# Altium PCB Board_PCB.PcbDoc (part 1 of 3)
Units mm, origin at the board's own origin, x right, y up, seen from the top; angles counter-clockwise.
Board outline 122.55 x 106.6 mm, 2 copper layers (Top Layer, Bottom Layer); 120 components, 188 nets, 670 pads, 282 vias.
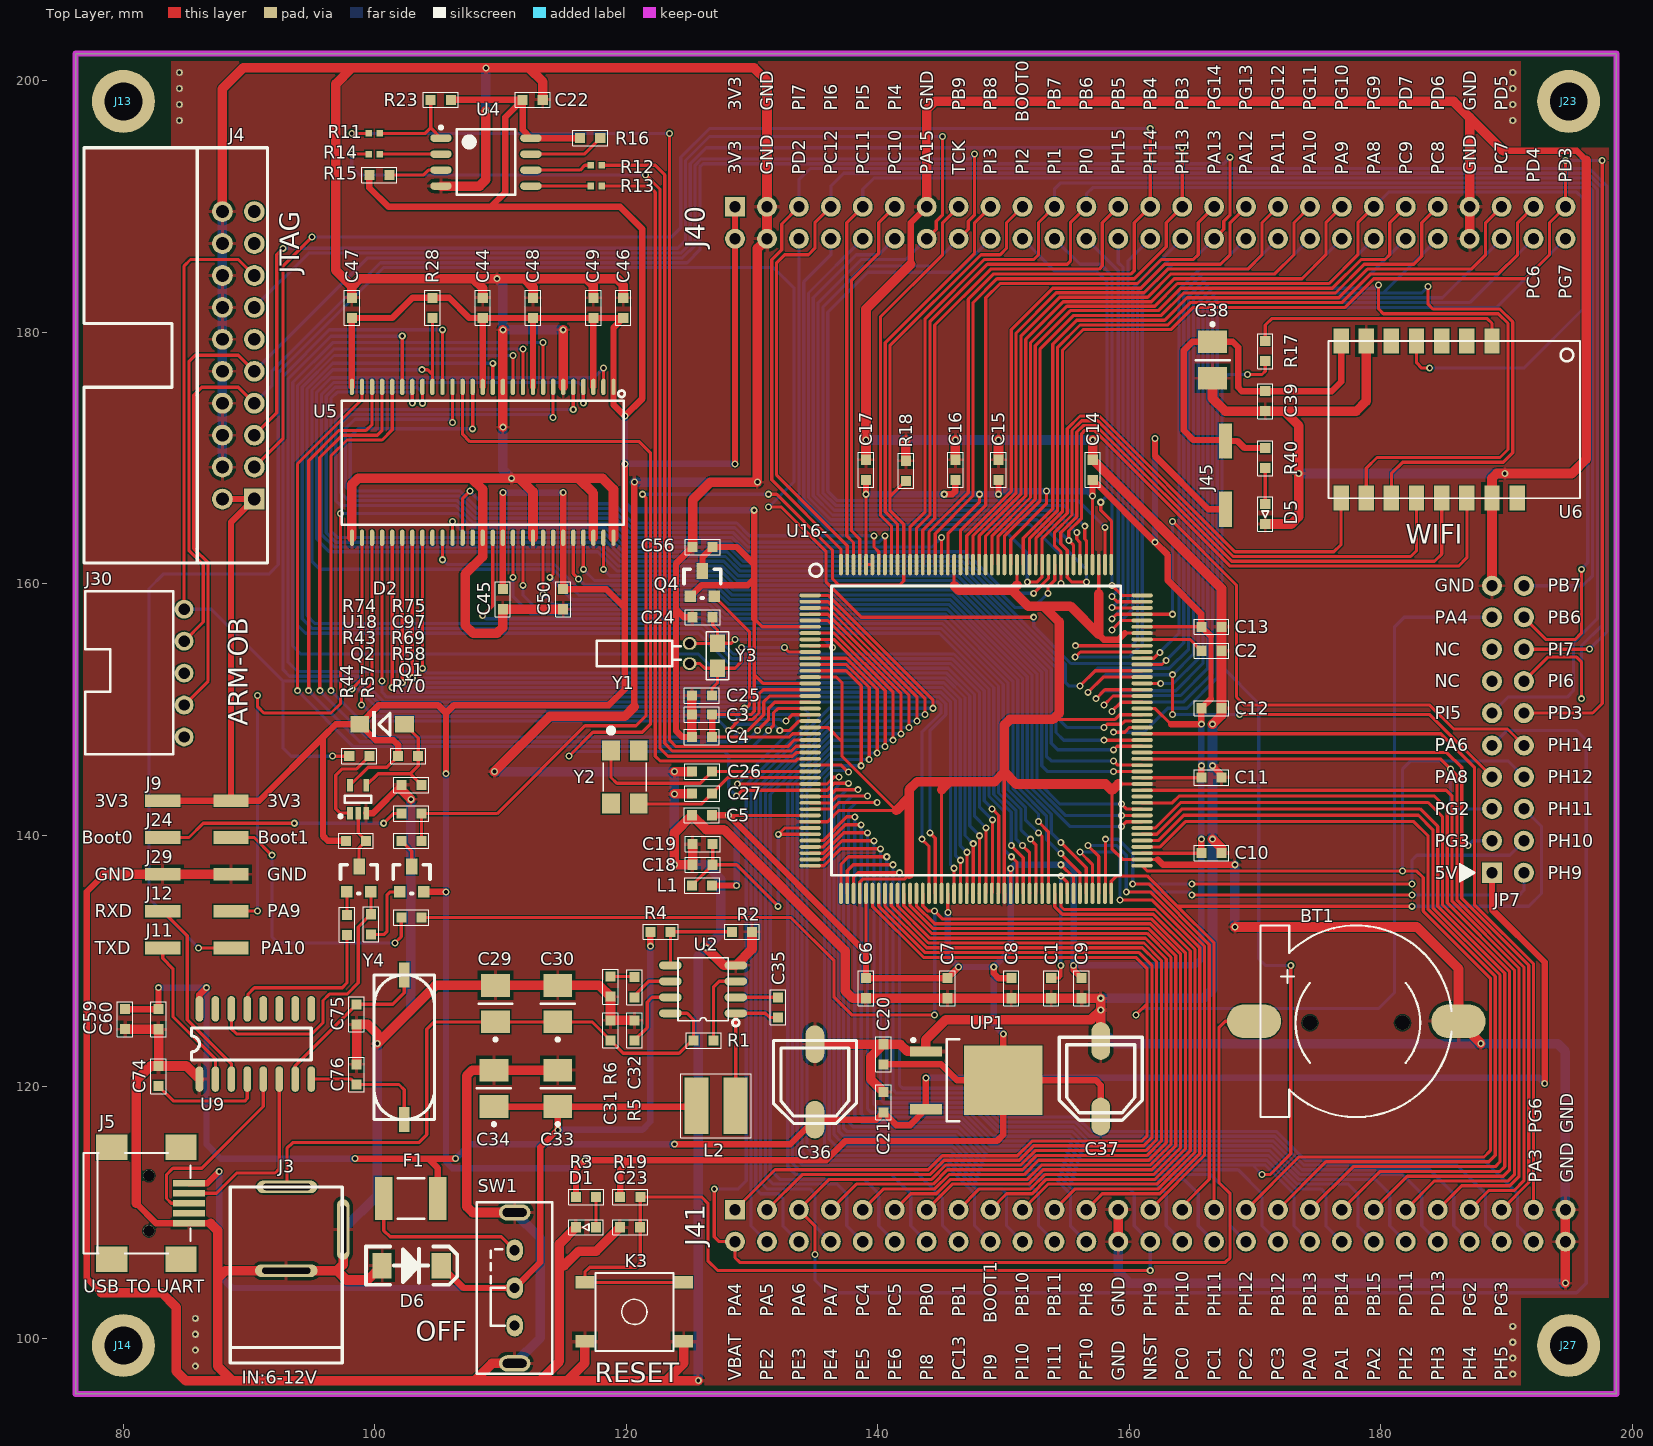
[diagram p0: Top Layer view]
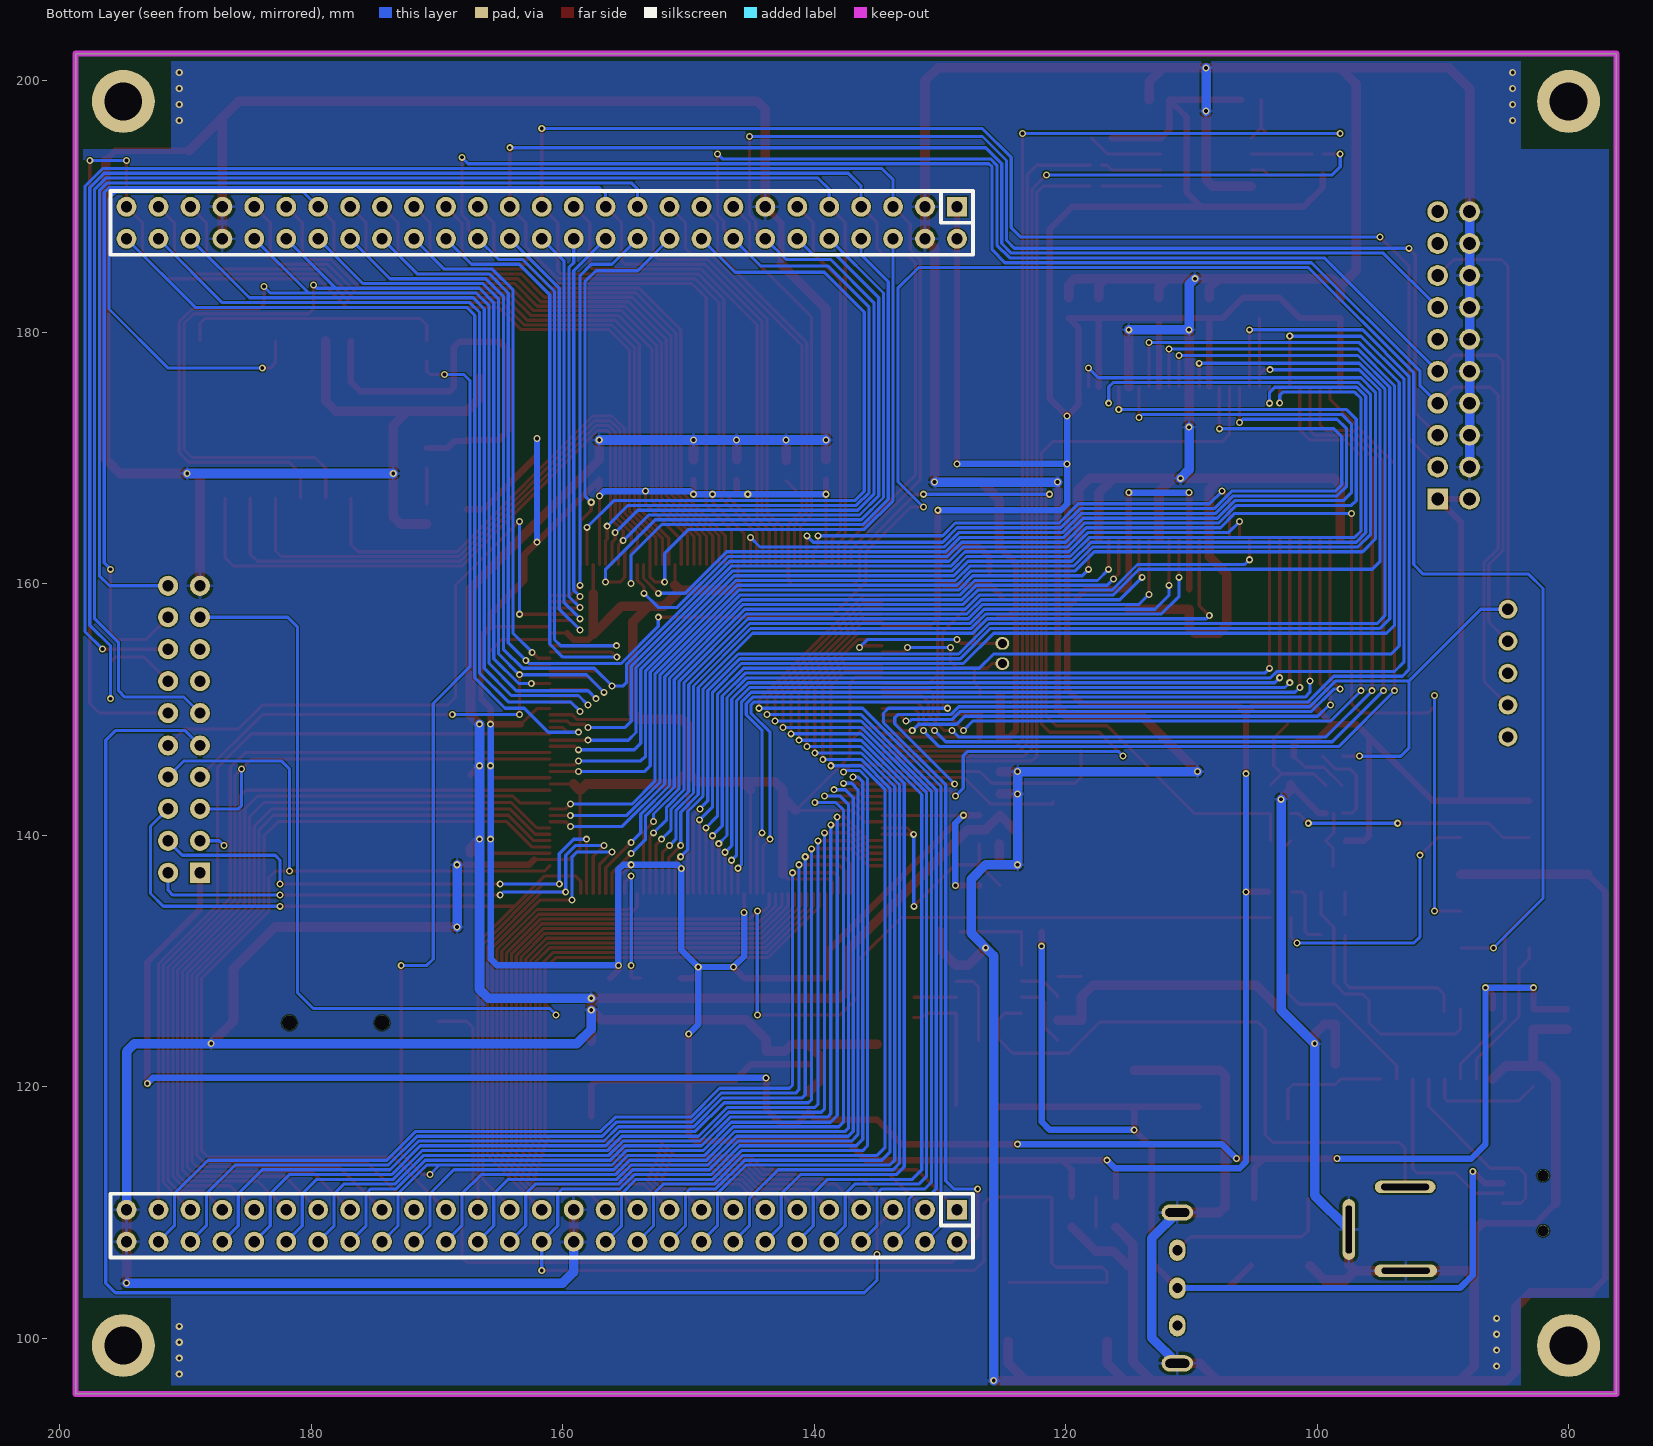
[diagram p1: Bottom Layer view, seen from below]

## Layer stack, top to bottom
Top Solder: solder mask 0.0102, Solder Resist, Dk 3.5
Top Layer: signal copper 0.0356
Dielectric 1: dielectric 0.32, FR-4, Dk 4.8
Bottom Layer: signal copper 0.0356
Bottom Solder: solder mask 0.0102, Solder Resist, Dk 3.5

## Board outline
76.2,95.584 76.2,202.184 198.75,202.184 198.75,95.584

## Design rules (kind name [scope] priority, off if disabled: settings)
Clearance [All] p1: gap=0.1
HoleSize [All] p1: absolutevalues=TRUE maxlimit=3.81 minlimit=0.025 maxpercent=80.000 minpercent=20.000
MinimumSolderMaskSliver [All] p1: minsoldermaskwidth=0.025
PolygonConnect [All] p1: connectstyle=Relief reliefconductorwidth=0.254 reliefentries=4 polygonreliefangle="90 Angle" airgapwidth=0.254
RoutingVias [All] p1: holewidth=0.305 width=0.56 viastyle="Through Hole" minholewidth=0.711 minwidth=1.27 maxholewidth=0.711 maxwidth=1.27
SilkToSilkClearance [All] p1: silktosilkclearance=0.025
SilkToSolderMaskClearance [IsPad] p1: minsilkscreentomaskgap=0.025 clearancetoexposedcopper=TRUE
SolderMaskExpansion [All] p1: expansion=0.102
UnpouredPolygon [All] p1: allowunpoured=FALSE
Width [All] p1: maxlimit=1.27 minlimit=0.254 preferedwidth=0.254 minimp=50.000000 maximp=50.000000 favimp=50.000000
25 further rules are at their usual default settings.

## Components (designator, comment, footprint, x,y, rotation, side; value= is the part's Value field where it differs from the comment)
BT1 "CR1220" BATERY 168.656,117.602 r0 top
C1 "C_2.2UF_0603" CAP_0603_FIRE 153.797,128.651 r270 top
C2 "C_2.2UF_0603" CAP_0603_FIRE 165.735,154.686 r0 top
C3 "C_0.1UF_0603" C_0603 126.823,149.606 r180 top
C4 "C_0.1UF_0603" C_0603 126.823,147.828 r180 top
C5 "C_0.1UF_0603" C_0603 126.823,141.605 r180 top
C6 "C_0.1UF_0603" C_0603 139.065,128.651 r270 top
C7 "C_0.1UF_0603" C_0603 145.542,128.651 r270 top
C8 "C_0.1UF_0603" C_0603 150.622,128.651 r270 top
C9 "C_0.1UF_0603" C_0603 156.21,128.651 r270 top
C10 "C_0.1UF_0603" C_0603 165.735,138.607 r0 top
C11 "C_0.1UF_0603" C_0603 165.735,144.603 r0 top
C12 "C_0.1UF_0603" C_0603 165.735,150.114 r0 top
C13 "C_0.1UF_0603" C_0603 165.735,156.591 r0 top
C14 "C_0.1UF_0603" C_0603 157.099,168.275 r90 top
C15 "C_0.1UF_0603" C_0603 149.606,168.275 r90 top
C16 "C_0.1UF_0603" C_0603 146.177,168.275 r90 top
C17 "C_0.1UF_0603" C_0603 139.065,168.275 r90 top
C18 "C_10UF_0603" C_0603 126.873,137.668 r180 top
C19 "C_0.1UF_0603" C_0603 126.873,139.319 r180 top
C20 "C_0.1UF_0603" C_0603 140.462,121.793 r90 top
C21 "C_0.1UF_0603" C_0603 140.462,117.983 r90 top
C22 "C_0.1UF_0603" C_0603 111.76,198.501 r0 top
C23 "C_0.1UF_0603" C_0603 119.507,108.839 r0 top
C24 "C_10P_0603" C_0603 126.873,157.353 r180 top
C25 "C_10P_0603" C_0603 126.823,151.13 r180 top
C26 "C_22P_0603" C_0603 125.222,145.08 r0 top
C27 "C_22P_0603" C_0603 125.223,143.342 r0 top
C29 "C+_10UF_B" AVX_B_3528-21 109.601,126.619 r90 top
C30 "C+_10UF_B" AVX_B_3528-21 114.554,126.619 r90 top
C31 "C_0.1UF_0603" C_0603 118.745,123.698 r90 top
C32 "C_2.7NF_0603" C_0603 120.65,127.127 r90 top
C33 "C+_10UF_B" AVX_B_3528-21 114.554,119.888 r90 top
C34 "C+_10UF_B" AVX_B_3528-21 109.474,119.888 r90 top
C35 "C_0.1UF_0603" C_0603 132.08,125.526 r90 top
C36 "CAP+_47UF_6.5X6.5" EC_47UF_6.5X6.5 135.001,120.396 r180 top
C37 "CAP+_47UF_6.5X6.5" EC_47UF_6.5X6.5 157.734,120.65 r180 top
C38 "C+_10UF_B" AVX_B_3528-21 166.624,177.8 r270 top
C39 "C_0.1UF_0603" C_0603 170.815,173.736 r90 top
C44 "C_0.1UF_0603" C_0603 108.585,182.753 r270 top
C45 "C_0.1UF_0603" C_0603 110.18,157.988 r90 top
C46 "C_0.1UF_0603" C_0603 119.761,182.753 r270 top
C47 "C_0.1UF_0603" C_0603 98.181,182.753 r270 top
C48 "C_0.1UF_0603" C_0603 112.59,182.753 r270 top
C49 "C_0.1UF_0603" C_0603 117.385,182.753 r270 top
C50 "C_0.1UF_0603" C_0603 114.985,157.988 r90 top
C56 "C_0.1UF_0603" C_0603 126.873,162.941 r180 top
C59 "C_10UF" C_0603 80.137,126.191 r270 top
C60 "C_0.1UF_0603" C_0603 82.804,124.587 r90 top
C74 "C_0.1UF_0603" C_0603 82.804,121.666 r270 top
C75 "C_22P_0603" C_0603 98.552,124.968 r90 top
C76 "C_22P_0603" C_0603 98.552,121.793 r270 top
C97 "C_10UF_0603" C_0603 102.108,144.018 r0 top
D1 "LED_RED_0603" LED_0603 117.602,108.839 r180 top
D2 "IN4148" DIODE_SOP 102.362,148.844 r180 top
D5 "LED_RED_0603" LED_0603 170.815,166.37 r270 top
D6 "SMAJ5.0CA" DO-214 100.584,105.791 r0 top
F1 "FUSE500MA" C1812 102.87,111.125 r0 top
J3 "DC-005" DC-005 97.409,98.044 r90 top
J4 "20PIN-JTAG" 20PIN-JTAG 87.884,166.751 r270 top
J5 "USB-MINI" USB-MINI 82.042,110.744 r90 top
J9 "1X2PIN_SMD" 1X2PIN_SMD 85.852,142.748 r0 top
J11 "1X2PIN_SMD" 1X2PIN_SMD 85.852,131.064 r180 top
J12 "1X2PIN_SMD" 1X2PIN_SMD 85.852,133.985 r180 top
J13 "3.0MM" 3.0MM#1 80.01,198.374 r0 top
J14 "3.0MM" 3.0MM#2 80.01,99.441 r0 top
J23 "3.0MM" 3.0MM#3 194.945,198.374 r0 top
J24 "1X2PIN_SMD" 1X2PIN_SMD 85.852,139.827 r0 top
J27 "3.0MM" 3.0MM#4 194.945,99.441 r0 top
J29 "1X2PIN_SMD" 1X2PIN_SMD 85.852,136.906 r0 top
J30 "XH2.54-5P" XH2.54-5P 79.756,155.448 r270 top
J40 "2X27PIN_DIP" 2X27X2.54MM 128.651,189.992 r270 top
J41 "2X27PIN_DIP" 2X27X2.54MM 128.651,110.236 r270 top
J45 "1X2PIN_SMD" 1X2PIN_SMD 167.64,168.656 r270 top
JP7 "CAMERA-PORT" 20PIN_2.54_DIP_BOT 188.849,159.893 r0 top
K3 "KEY" SW6.2/6.2-SMD 120.65,102.108 r180 top
L1 "BEAD-0603" R_0603 125.222,136.017 r0 top
L2 "L_6.8UH_4532" GDCD4532 127.127,118.491 r180 top
Q1 "S8550" SOT-23 101.981,135.509 r0 top
Q2 "S8050" SOT-23 97.79,135.509 r0 top
Q4 "BAT54C" SOT-23 125.095,159.004 r0 top
R1 "R_100K_0603" R_0603 125.349,123.698 r0 top
R2 "R_11.8K_0603" R_0603 128.397,132.334 r0 top
R3 "R_1K_0603" R_0603 116.001,111.252 r0 top
R4 "R_62K_0603" R_0603 121.92,132.334 r0 top
R5 "R_180K_0603" R_0603 120.65,123.698 r90 top
R6 "R_24K_0603" R_0603 118.745,128.778 r270 top
R11 "R_33R_0402" SR0402 99.949,195.834 r180 top
R12 "R_33R_0402" SR0402 117.602,193.294 r0 top
R13 "R_33R_0402" SR0402 117.602,191.643 r0 top
R14 "R_33R_0402" SR0402 99.949,194.183 r180 top
R15 "R_10K_0603" R_0603 99.568,192.532 r0 top
R16 "R_10K_0603" R_0603 116.332,195.453 r0 top
R17 "R_1K_0603" R_0603 170.815,179.324 r270 top
R18 "R_10K_0603" R_0603 142.24,169.799 r270 top
R19 "R_10K_0603" R_0603 121.118,111.252 r180 top
R23 "R_10K_0603" R_0603 106.045,198.501 r180 top
R28 "R_10K_0603" R_0603 104.58,182.753 r270 top
R40 "R_1K_0603" R_0603 170.815,170.815 r270 top
R43 "R_10K_0603" R_0603 99.314,139.573 r180 top
R44 "R_2.7K_0603" R_0603 97.79,132.08 r90 top
R57 "R_1K_0603" R_0603 99.695,133.731 r270 top
R58 "R_1K_0603" R_0603 102.108,139.573 r0 top
R69 "R_10K_0603" R_0603 103.709,141.732 r180 top
R70 "R_10K_0603" R_0603 102.108,133.477 r0 top
R74 "R_2.7K_0603" R_0603 99.568,146.304 r180 top
R75 "R_100K_0603" R_0603 101.854,146.304 r0 top
SW1 "SW-POWER" SW13_6 111.125,104.013 r90 top
U2 "RT7272" RT7272 126.111,127.762 r180 top
U4 "W25Q128FVSG" W25X16 108.839,193.548 r0 top
U5 "IS42S16400J" TSOP-54 108.585,169.672 r270 top
U6 "EMW1062" EMW1062 175.85,179.324 r270 top
U9 "CH340G" SOP16 95.377,119.507 r90 top
U16- "STM32F429XGT6" LQFP176 147.574,148.59 r0 top
U18 "74HC1G66GW" SOT-353 98.679,142.875 r90 top
UP1 "1086-3.3" TO-252-2L 147.828,120.523 r0 top
Y1 "XTAL_32.768KHZ" CRYS-3X8 124.841,153.67 r0 top
Y2 "CRYSTAL_25MHZ" CRYSTAL_25MHZ 119.888,144.653 r270 top
Y3 "NC/XTAL_32.768KHZ_3215" 3215 127.254,153.289 r90 top
Y4 "XTAL_12M" XTAL_SMD 99.949,128.905 r90 top

## Footprints (in the part's own frame and the unit in brackets; to place one, negate y for a bottom-side part, rotate by r counter-clockwise, add the part's x,y. Pads: shape width x height; smd on the part's side, far side on the other; paste and mask are expansions set on the pad)
1X2PIN_SMD [mm]
  rect 2.8x1.02 smd: 1(-2.715,0.011) 2(2.715,0.011)
2X27X2.54MM [mil]
  rect 62x62 hole 35.43: 1(0,0)
  round 62 hole 35.43: 2(100,0) 3(0,100) 4(100,100) 5(0,200) 6(100,200) 7(0,300) 8(100,300) 9(0,400) 10(100,400) 11(0,500) 12(100,500) 13(0,600) 14(100,600) 15(0,700) 16(100,700) 17(0,800) 18(100,800) 19(0,900) 20(100,900) 21(0,1000) 22(100,1000) 23(0,1100) 24(100,1100) 25(0,1200) 26(100,1200) 27(0,1300) 28(100,1300) 29(0,1400) 30(100,1400) 31(0,1500) 32(100,1500) 33(0,1600) 34(100,1600) 35(0,1700) 36(100,1700) 37(0,1800) 38(100,1800) 39(0,1900) 40(100,1900) 41(0,2000) 42(100,2000) 43(0,2100) 44(100,2100) 45(0,2200) 46(100,2200) 47(0,2300) 48(100,2300) 49(0,2400) 50(100,2400) 51(0,2500) 52(100,2500) 53(0,2600) 54(100,2600)
3.0MM#1 [mm]
  round 5 hole 3: 1(0,0)
3.0MM#2 [mm]
  round 5 hole 3: 2(0,0)
3.0MM#3 [mm]
  round 5 hole 3: 4(0,0)
3.0MM#4 [mm]
  round 5 hole 3: 3(0,0)
20PIN-JTAG [mil]
  rect 65x65 hole 40: 1(0,100)
  round 65 hole 40: 2(0,0) 3(-100,100) 4(-100,0) 5(-200,100) 6(-200,0) 7(-300,100) 8(-300,0) 9(-400,100) 10(-400,0) 11(-500,100) 12(-500,0) 13(-600,100) 14(-600,0) 15(-700,100) 16(-700,0) 17(-800,100) 18(-800,0) 19(-900,100) 20(-900,0)
  silkscreen extent -1100,-433 200,141
20PIN_2.54_DIP_BOT [mm]
  rect 1.6x1.6 hole 0.9: 1(0,-22.86)
  round 1.6 hole 0.9: 2(2.54,-22.86) 3(0,-20.32) 4(2.54,-20.32) 5(0,-17.78) 6(2.54,-17.78) 7(0,-15.24) 8(2.54,-15.24) 9(0,-12.74) 10(2.54,-12.74) 11(0,-10.16) 12(2.54,-10.16) 13(0,-7.62) 14(2.54,-7.62) 15(0,-5.08) 16(2.54,-5.08) 17(0,-2.54) 18(2.54,-2.54) 19(0,-0.04) 20(2.54,-0.04)
  silkscreen extent -2.61,-23.6 -1.32,-22.13
3215 [mm]
  rect 1.4x1.2 smd: 1(0,0) 2(2,0)
  silkscreen extent -0.89,-0.89 2.92,0.89
AVX_B_3528-21 [mm]
  rect 1.8x2.3 smd: 1(-1.45,0) 2(1.45,0)
  silkscreen extent -2.97,-1.35 0,1.35
BATERY [mil]
  round 46 hole 46: 0(515,295) 0/2(225,295)
  oval 169.29x106.3 smd: 1(50,300) 2(690,300)
  silkscreen extent 70,0 668,600
C1812 [mm]
  rect 1.4x3.4 smd: 1(-2.15,0) 2(2.15,0)
  silkscreen extent -1.05,-1.6 1.05,1.6
C_0603 [mm]
  rect 0.8x0.8 smd: 1(0,0) 2(1.6,0)
  silkscreen extent -0.58,-0.61 2.2,0.61
CAP_0603_FIRE [mm]
  rect 0.8x0.8 smd: 1(0,0) 2(1.6,0)
  silkscreen extent -0.58,-0.61 2.2,0.61
CRYS-3X8 [mm]
  oval 1.1x1 hole 0.7: 1(0.199,-0.003) 2(0.199,1.597)
  silkscreen extent -7.2,-0.2 -0.5,1.8
CRYSTAL_25MHZ [mm]
  rect 1.6x1.4 smd: 1(-2.1,-1.1) 2(2.1,-1.1) 3(2.1,1.1) 4(-2.1,1.1)
  silkscreen extent -3.8,-1.7 1.13,1.7
DC-005 [mm]
  oval 1x4.826 hole 0.5 slot 3.81 at 90 deg: 1(14,4.399)
  oval 1x4.978 hole 0.5 slot 3.81 at 90 deg: 2(7.341,4.445)
  oval 4.826x1 hole 0.5 slot 3.81 at 0 deg: 3(10.617,-0.076)
  silkscreen extent 0,0 14,8.9
DIODE_SOP [mm]
  rect 1.5x1.3 smd: 1(0,0) 2(3.556,0)
  silkscreen extent 1.14,-1.02 2.56,1.02
DO-214 [mil]
  rect 60x80 smd: 1(0,0) 2(185,0)
  silkscreen extent -50,-60 235,60
EC_47UF_6.5X6.5 [mm]
  oval 1.5x3 smd: 1(0,3) 2(0,-3)
  silkscreen extent -3.3,-3.3 3.3,3.3
EMW1062 [mm]
  rect 2x1.22 smd: 1(0,13) 2(0,11) 3(0,9) 4(0,7) 5(0,5) 6(0,3) 7(0,1) 8(12.5,1) 9(12.5,3) 10(12.5,5) 11(12.5,7) 12(12.5,9) 13(12.5,11) 14(12.5,13) 15(12.5,15)
  silkscreen extent 0,0 12.5,20
GDCD4532 [mm]
  rect 1.9x4.5 smd: 1(-1.55,0) 2(1.55,0)
  silkscreen extent -2.79,-2.54 2.79,2.54
LED_0603 [mm]
  rect 0.8x0.8 smd: A(0,0) K(1.6,0)
  silkscreen extent -0.58,-0.6 2.19,0.61
LQFP176 [mm]
  oval 1.7x0.3 smd: 1(-12.95,10.5) 2(-12.95,10) 3(-12.95,9.5) 4(-12.95,9) 5(-12.95,8.5) 6(-12.95,8) 7(-12.95,7.5) 8(-12.95,7) 9(-12.95,6.5) 10(-12.95,6) 11(-12.95,5.5) 12(-12.95,5) 13(-12.95,4.5) 14(-12.95,4) 15(-12.95,3.5) 16(-12.95,3) 17(-12.95,2.5) 18(-12.95,2) 19(-12.95,1.5) 20(-12.95,1) 21(-12.95,0.5) 22(-12.95,0) 23(-12.95,-0.5) 24(-12.95,-1) 25(-12.95,-1.5) 26(-12.95,-2) 27(-12.95,-2.5) 28(-12.95,-3) 29(-12.95,-3.5) 30(-12.95,-4) 31(-12.95,-4.5) 32(-12.95,-5) 33(-12.95,-5.5) 34(-12.95,-6) 35(-12.95,-6.5) 36(-12.95,-7) 37(-12.95,-7.5) 38(-12.95,-8) 39(-12.95,-8.5) 40(-12.95,-9) 41(-12.95,-9.5) 42(-12.95,-10) 43(-12.95,-10.5) 44(-12.95,-11) 89(13.45,-11) 90(13.45,-10.5) 91(13.45,-10) 92(13.45,-9.5) 93(13.45,-9) 94(13.45,-8.5) 95(13.45,-8) 96(13.45,-7.5) 97(13.45,-7) 98(13.45,-6.5) 99(13.45,-6) 100(13.45,-5.5) 101(13.45,-5) 102(13.45,-4.5) 103(13.45,-4) 104(13.45,-3.5) 105(13.45,-3) 106(13.45,-2.5) 107(13.45,-2) 108(13.45,-1.5) 109(13.45,-1) 110(13.45,-0.5) 111(13.45,0) 112(13.45,0.5) 113(13.45,1) 114(13.45,1.5) 115(13.45,2) 116(13.45,2.5) 117(13.45,3) 118(13.45,3.5) 119(13.45,4) 120(13.45,4.5) 121(13.45,5) 122(13.45,5.5) 123(13.45,6) 124(13.45,6.5) 125(13.45,7) 126(13.45,7.5) 127(13.45,8) 128(13.45,8.5) 129(13.45,9) 130(13.45,9.5) 131(13.45,10) 132(13.45,10.5)
  oval 0.3x1.7 smd: 45(-10.5,-13.2) 46(-10,-13.2) 47(-9.5,-13.2) 48(-9,-13.2) 49(-8.5,-13.2) 50(-8,-13.2) 51(-7.5,-13.2) 52(-7,-13.2) 53(-6.5,-13.2) 54(-6,-13.2) 55(-5.5,-13.2) 56(-5,-13.2) 57(-4.5,-13.2) 58(-4,-13.2) 59(-3.5,-13.2) 60(-3,-13.2) 61(-2.5,-13.2) 62(-2,-13.2) 63(-1.5,-13.2) 64(-1,-13.2) 65(-0.5,-13.2) 66(0,-13.2) 67(0.5,-13.2) 68(1,-13.2) 69(1.5,-13.2) 70(2,-13.2) 71(2.5,-13.2) 72(3,-13.2) 73(3.5,-13.2) 74(4,-13.2) 75(4.5,-13.2) 76(5,-13.2) 77(5.5,-13.2) 78(6,-13.2) 79(6.5,-13.2) 80(7,-13.2) 81(7.5,-13.2) 82(8,-13.2) 83(8.5,-13.2) 84(9,-13.2) 85(9.5,-13.2) 86(10,-13.2) 87(10.5,-13.2) 88(11,-13.2) 133(11,12.95) 134(10.5,12.95) 135(10,12.95) 136(9.5,12.95) 137(9,12.95) 138(8.5,12.95) 139(8,12.95) 140(7.5,12.95) 141(7,12.95) 142(6.5,12.95) 143(6,12.95) 144(5.5,12.95) 145(5,12.95) 146(4.5,12.95) 147(4,12.95) 148(3.5,12.95) 149(3,12.95) 150(2.5,12.95) 151(2,12.95) 152(1.5,12.95) 153(1,12.95) 154(0.5,12.95) 155(0,12.95) 156(-0.5,12.95) 157(-1,12.95) 158(-1.5,12.95) 159(-2,12.95) 160(-2.5,12.95) 161(-3,12.95) 162(-3.5,12.95) 163(-4,12.95) 164(-4.5,12.95) 165(-5,12.95) 166(-5.5,12.95) 167(-6,12.95) 168(-6.5,12.95) 169(-7,12.95) 170(-7.5,12.95) 171(-8,12.95) 172(-8.5,12.95) 173(-9,12.95) 174(-9.5,12.95) 175(-10,12.95) 176(-10.5,12.95)
  silkscreen extent -13,-11.75 11.75,13
R_0603 [mm]
  rect 0.8x0.8 smd: 1(0,0) 2(1.6,0)
  silkscreen extent -0.58,-0.61 2.2,0.61
RT7272 [mm]
  oval 1.8x0.635 smd: 1(-2.6,1.905) 2(-2.6,0.635) 3(-2.6,-0.635) 4(-2.6,-1.905) 5(2.6,-1.905) 6(2.6,-0.635) 7(2.6,0.635) 8(2.6,1.905)
  silkscreen extent -2.87,-2.5 2,2.92
SOP16 [mil]
  oval 80x24 smd: 1(44,367) 2(44,317) 3(44,267) 4(44,217) 5(44,167) 6(44,117) 7(44,67) 8(44,17) 9(264,17) 10(264,67) 11(264,117) 12(264,167) 13(264,217) 14(264,267) 15(264,317) 16(264,367)
  silkscreen extent 104,17 204,392
SOT-23 [mil]
  rect 36x36 smd: 1(0,0) 2(75,0)
  rect 36x50 smd: 3(38,80)
  silkscreen extent -20,-5 95,85
SOT-353 [mm]
  rect 1x0.45 smd: 1(-1.1,0.65) 2(-1.1,0) 3(-1.1,-0.65) 4(1.1,-0.65) 5(1.1,0.65)
  silkscreen extent -1.47,-1.05 0.27,1.52
SR0402 [mm]
  rect 0.52x0.53 smd: 1(-0.435,0) 2(0.435,0)
SW6.2/6.2-SMD [mm]
  rect 1.5x1 smd: 1(-3.912,2.35) 2(3.937,2.35) 3(-3.912,-2.35) 4(3.937,-2.35)
  silkscreen extent -3.1,-3.1 3.1,3.1
SW13_6 [mm]
  oval 1.7x1.3 hole 0.8: 1(-3,0) 2(0,0) 3(3,0)
  oval 1.3x2.5 hole 0.7 slot 1.905 at 90 deg: 4(-6,0) 5(6,0)
  silkscreen extent -6.83,-3 6.83,3
TO-252-2L [mm]
  rect 2.55x0.8 smd: 1(-4,2.3) 3(-4,-2.3)
  rect 6.25x5.55 smd: 2(2.15,0)
  silkscreen extent -5.12,-3.25 -1.35,3.32
TSOP-54 [mm]
  oval 1.3x0.35 smd: 1(-6,10.4) 2(-6,9.6) 3(-6,8.8) 4(-6,8) 5(-6,7.2) 6(-6,6.4) 7(-6,5.6) 8(-6,4.8) 9(-6,4) 10(-6,3.2) 11(-6,2.4) 12(-6,1.6) 13(-6,0.8) 14(-6,0) 15(-6,-0.8) 16(-6,-1.6) 17(-6,-2.4) 18(-6,-3.2) 19(-6,-4) 20(-6,-4.8) 21(-6,-5.6) 22(-6,-6.4) 23(-6,-7.2) 24(-6,-8) 25(-6,-8.8) 26(-6,-9.6) 27(-6,-10.4) 28(6,-10.4) 29(6,-9.6) 30(6,-8.8) 31(6,-8) 32(6,-7.2) 33(6,-6.4) 34(6,-5.6) 35(6,-4.8) 36(6,-4) 37(6,-3.2) 38(6,-2.4) 39(6,-1.6) 40(6,-0.8) 41(6,0) 42(6,0.8) 43(6,1.6) 44(6,2.4) 45(6,3.2) 46(6,4) 47(6,4.8) 48(6,5.6) 49(6,6.4) 50(6,7.2) 51(6,8) 52(6,8.8) 53(6,9.6) 54(6,10.4)
  silkscreen extent -5.71,-11.2 4.96,11.3
USB-MINI [mm]
  rect 0.508x2.54 smd: 1(1.6,-3.2) 2(0.8,-3.2) 3(0,-3.2) 4(-0.8,-3.2) 5(-1.6,-3.2)
  rect 2.032x2.5 smd: 6(-4.45,-2.55) 7(-4.45,2.95) 8(4.45,2.95) 9(4.45,-2.55)
  round 0.9 hole 0.9 unplated: 10(2.2,0) 11(-2.2,0)
  silkscreen extent -4,-3.3 4,5.2
W25X16 [mm]
  oval 1.7x0.6 smd: 1(-3.575,1.905) 2(-3.575,0.635) 3(-3.575,-0.635) 4(-3.575,-1.905) 5(3.575,-1.905) 6(3.575,-0.635) 7(3.575,0.635) 8(3.575,1.905)
  silkscreen extent -3.7,-2.6 2.33,2.88
XH2.54-5P [mm]
  round 1.5 hole 0.9: 1(-2.54,5.08) 2(0,5.08) 3(2.54,5.08) 4(5.08,5.08) 5(7.62,5.08)
  silkscreen extent -3.96,-2.79 8.99,4.21
XTAL_SMD [mm]
  rect 2x0.85 smd: 1(-11.5,-2.4) 2(0,-2.4)
  silkscreen extent -11.5,-4.8 0,0

## Part data
D6: "SMAJ5.0CA-E3/61 400W 5V"
F1: "FUSE500ma"
Q1 Q2: "NPN"
SW1: "SW-5"
Y3: "CRYSTAL"

## Via types
v1: diameter 0.56, hole 0.305, Top Layer to Bottom Layer, tented both sides, 282 vias

## Nets (pads, with @x,y where several pads share a name; then routed paths per layer and width w, separated by ;. In a path a pad name is that pad's centre, name@x,y a point inside that pad or via, vN(x,y) a via of type N, cw(c..) or ccw(c..) an arc to the next point about the centre after c; other vN are vias at no path point)
3V3: C3.1 C4.1 C5.1 C6.1 C7.1 C8.1 C9.1 C10.1 C11.1 C12.1 C13.1 C14.1 C15.1 C16.1 C17.1 C20.1 C22.1 C37.1 C44.2 C45.2 C46.2 C47.2 C48.2 C49.2 C50.2 C56.1 D2.2 J4.1 J4.2 J9.1 J9.2 J40.1 J40.2 J45.2 L1.2 Q1.2 Q4.1 Q4.3 R3.1 R15.1 R16.1 R19.2 R23.1 R28.1 R43.2 R75.1 U4.8 U5.1 U5.3 U5.9 U5.14 U5.27 U5.43 U5.49 U16-.6 U16-.15 U16-.23 U16-.36 U16-.49 U16-.62 U16-.72 U16-.82 U16-.91 U16-.103 U16-.114 U16-.127 U16-.136 U16-.149 U16-.159 U16-.171 U16-.172 U18.5 UP1.2 | length 690.8
  Top Layer w0.254: U18.5@98.029,143.975 99.469,145.415 100.965,145.415 R75.1@101.854,146.304 ; C48.2@112.585,181.148 C48.2@112.59,181.153 ; C4.1@126.823,147.828 132.969,147.828 133.231,148.09 U16-.23@134.624,148.09 ; C3.1@126.873,149.606 129.921,149.606 130.175,149.86 130.175,152.781 ; v1@128.143,141.59 U16-.36@134.624,141.59 ; U16-.15@134.624,152.09 130.866,152.09 130.175,152.781 ; U16-.6@134.624,156.59 130.811,156.59 130.175,157.226 130.175,152.781 ; C17.1@139.065,168.275 C17.1@139.074,168.266 ; 139.074,130.692 U16-.49@139.074,135.39 ; v1@139.074,167.123 U16-.172@139.074,161.54 U16-.171@139.574,161.54 ; v1(145.574,133.858) U16-.62@145.574,135.39 ; U16-.159@145.574,161.54 145.581,161.547 145.581,163.996 148.082,166.497 v1(148.082,167.132) ; U16-.72@150.574,135.39 v1(150.574,137.366) ; U16-.149@150.574,161.54 150.574,163.528 153.416,166.37 v1(153.416,167.386) ; v1(154.559,137.668) 155.574,136.653 U16-.82@155.574,135.39 U16-.82@155.575,135.391 ; U16-.136@157.074,161.54 v1(157.074,167.005) ; U16-.91@161.024,138.59 C10.1@165.718,138.59 ; U16-.103@161.024,144.59 C11.1@165.722,144.59 ; U16-.114@161.024,150.09 162.076,150.09 163.322,148.844 ; U16-.127@161.024,156.59 C13.1@165.735,156.591
  Top Layer w0.4: 166.497,150.876 166.497,155.829
  Top Layer w0.508: J9.1@83.137,142.759 J9.2@88.567,142.759 ; J4.2@87.884,166.751 J4.1@90.424,166.751 88.567,164.894 J9.2@88.567,142.759 ; R43.2@97.714,139.573 96.266,139.573 95.885,139.954 95.885,147.828 ; U5.27@98.181,175.676 C47.2@98.181,181.153 101.397,181.153 102.997,182.753 R28.1@104.58,182.753 105.918,182.753 107.518,181.153 C44.2@108.585,181.153 ; R15.1@99.568,192.532 99.568,191.516 101.092,189.992 109.22,189.992 ; R75.1@101.854,146.304 101.854,147.193 101.473,147.574 100.076,147.574 D2.2@98.806,148.844 ; Q1.2@103.886,135.509 v1(105.664,135.509) ; v1(105.664,144.907) 105.664,149.733 ; R23.1@106.045,198.501 C22.1@111.76,198.501 ; U5.14@108.585,175.672 C44.2@108.585,181.153 ; C45.2@110.185,159.593 U5.43@110.185,163.672 v1(110.185,167.259) ; U5.9@112.585,175.672 C48.2@112.585,181.153 ; v1(114.985,167.259) U5.49@114.985,163.672 C50.2@114.985,159.588 118.415,159.588 119.888,158.115 ; R3.1@116.001,111.252 116.001,113.461 v1(116.713,114.173) 120.269,114.173 ; R16.1@116.332,195.453 U4.8@112.414,195.453 111.76,196.107 C22.1@111.76,198.501 ; U5.3@117.385,175.672 C49.2@117.385,181.153 ; R19.2@119.518,111.252 119.518,113.422 120.269,114.173 ; v1(119.888,169.545) 119.888,158.115 ; Q4.1@125.095,159.004 125.984,159.893 129.667,159.893 130.175,160.401 ; Q4.3@126.06,161.036 126.06,162.128 C56.1@126.873,162.941 128.778,162.941 130.175,161.544 ; L1.2@126.822,136.017 v1(128.778,136.017) ; C4.1@126.823,147.828 C3.1@126.823,149.606 ; C5.1@126.873,141.605 v1(128.143,141.605) 139.065,130.683 C6.1@139.065,128.651 C7.1@145.542,128.651 v1(146.431,129.54) ; v1(128.651,169.545) J40.2@128.651,187.452 J40.1@128.651,189.992 ; 130.175,157.226 130.175,160.401 ; v1(130.175,165.862) 130.175,161.544 ; v1(139.065,167.132) C17.1@139.065,168.275 ; C20.1@140.462,121.793 145.034,121.793 146.304,120.523 UP1.2@149.978,120.523 ; v1(145.288,167.132) 145.923,167.132 146.177,167.386 C16.1@146.177,168.275 ; v1(149.225,129.54) 149.225,129.032 149.606,128.651 C8.1@150.622,128.651 ; v1(149.606,167.132) C15.1@149.606,168.275 ; UP1.2@149.987,120.532 v1(149.987,124.206) ; v1(155.575,129.667) 155.575,129.286 C9.1@156.21,128.651 ; v1(157.074,167.005) C14.1@157.074,168.25 ; C14.1@157.099,168.275 v1(162.052,163.322) 163.078,162.296 163.078,160.271 165.735,157.614 C13.1@165.735,156.591 166.497,155.829 ; C37.1@157.734,117.65 157.734,120.142 157.353,120.523 UP1.2@149.978,120.523 ; v1(162.052,171.577) 162.052,170.18 166.291,165.941 J45.2@167.651,165.941 ; 163.322,148.844 v1(165.735,148.844) C12.1@165.735,150.114 166.497,150.876 ; C10.1@165.735,138.607 v1(165.735,139.7) ; C11.1@165.735,144.603 v1(165.735,145.542) ; J9.2@88.567,142.759 90.816,142.759 95.885,147.828 ; 95.885,147.828 96.901,148.844 D2.2@98.806,148.844 ; D2.2@98.806,148.844 100.33,150.368 105.029,150.368 105.664,149.733 ; 105.664,149.733 106.299,150.368 118.618,150.368 119.888,151.638 119.888,158.115 ; C44.2@108.585,181.153 C48.2@112.59,181.153 C49.2@117.385,181.153 ; 109.22,189.992 119.507,189.992 121.285,188.214 121.285,174.752 v1(119.888,173.355) 118.985,174.258 U5.1@118.985,175.672 118.985,180.377 C46.2@119.761,181.153 C49.2@117.385,181.153 ; 109.22,189.992 110.363,191.135 110.363,197.104 C22.1@111.76,198.501 ; 120.269,114.173 135.89,114.173 137.414,115.697 149.479,115.697 149.978,116.196 UP1.2@149.978,120.523 ; 130.175,160.401 130.175,161.544
  Bottom Layer w0.508: v1(105.664,144.907) v1(105.664,135.509) 105.664,114.046 106.172,113.538 116.078,113.538 v1(116.713,114.173) ; v1(110.185,167.259) v1(114.985,167.259) ; v1(119.888,173.355) v1(119.888,169.545) ; v1(128.143,141.605) 128.778,140.97 v1(128.778,136.017) ; v1(128.651,169.545) v1(119.888,169.545) ; v1(130.175,165.862) 120.396,165.862 119.888,166.37 v1(119.888,169.545) ; v1(139.065,167.132) v1(145.288,167.132) v1(148.082,167.132) v1(149.606,167.132) 149.86,167.386 v1(153.416,167.386) 156.693,167.386 v1(157.074,167.005) ; v1(145.574,133.858) 145.574,130.397 v1(146.431,129.54) v1(149.225,129.54) ; v1(149.987,124.206) 149.225,124.968 v1(149.225,129.54) ; v1(162.052,163.322) v1(162.052,171.577) ; v1(165.735,148.844) v1(165.735,145.542) v1(165.735,139.7) 165.735,130.175 165.227,129.667 v1(155.575,129.667) 155.575,137.287 155.194,137.668 v1(154.559,137.668) 150.876,137.668 v1(150.574,137.366) 150.574,130.889 v1(149.225,129.54)
3V3_8782: C38.1 C39.2 J45.1 R40.1 U6.7 | length 33.2
  Top Layer w0.508: J45.1@167.651,171.371 168.608,171.371 169.164,170.815 R40.1@170.815,170.815 ; J45.1@167.651,171.45 165.1,171.45 164.338,172.212 164.338,178.562 165.026,179.25 C38.1@166.624,179.25 168.222,179.25 168.656,178.816 168.656,175.641 168.961,175.336 C39.2@170.815,175.336 176.098,175.336 176.85,176.088 U6.7@176.85,179.324
5V: C21.1 C36.1 C59.1 C60.2 F1.2 JP7.1 U9.16 UP1.3 | length 156.6
  Top Layer w0.508: C59.1@80.137,126.191 C60.2@82.8,126.191 ; C60.2@82.804,126.187 v1(82.804,127.889) ; U9.16@86.055,126.213 86.055,127.33 v1(86.614,127.889) ; v1(98.425,114.3) 104.267,114.3 ; F1.2@105.02,111.125 105.02,113.547 104.267,114.3 ; v1(106.426,114.3) 104.267,114.3 ; v1(123.825,115.443) 133.048,115.443 C36.1@135.001,117.396 139.875,117.396 C21.1@140.462,117.983 141.478,116.967 142.572,116.967 UP1.3@143.828,118.223 v1(143.828,120.714) ; JP7.1@188.849,137.033 188.849,134.112 193.04,129.921 v1(193.04,120.269)
  Bottom Layer w0.508: v1(82.804,127.889) v1(86.614,127.889) 86.614,115.443 87.757,114.3 v1(98.425,114.3) ; v1(106.426,114.3) 107.569,115.443 v1(123.825,115.443) ; v1(143.828,120.714) 192.595,120.714 v1(193.04,120.269)
5V_USB: C33.1 C34.1 D6.2 J5.1 L2.2 R4.1 SW1.2 | length 95.9
  Top Layer w0.508: J5.1@85.242,112.344 86.69,112.344 v1(87.63,113.284) ; D6.2@105.283,105.791 107.061,104.013 SW1.2@111.125,104.013 113.157,106.045 113.157,115.189 v1(114.554,116.586) C33.1@114.554,118.11 ; C34.1@109.474,118.438 C33.1@114.554,118.438 L2.2@125.577,118.438 ; v1(121.92,131.191) R4.1@121.92,132.334
  Bottom Layer w0.508: v1(87.63,113.284) 87.63,105.029 88.646,104.013 SW1.2@111.125,104.013 ; v1(114.554,116.586) 121.285,116.586 121.92,117.221 v1(121.92,131.191)
GND: BT1.2 C1.2 C2.2 C3.2 C4.2 C5.2 C6.2 C7.2 C8.2 C9.2 C10.2 C11.2 C12.2 C13.2 C14.2 C15.2 C16.2 C17.2 C18.2 C19.2 C20.2 C21.2 C22.2 C23.1 C24.2 C25.2 C26.1 C27.1 C29.2 C30.2 C31.2 C33.2 C34.2 C36.2 C37.2 C38.2 C39.1 C44.1 C45.1 C46.1 C47.1 C48.1 C49.1 C50.1 C56.2 C59.2 C60.1 C74.1 C75.1 C76.1 C97.1 D1.K D5.K D6.1 J3.2 J3.3 J4.4 J4.6 J4.8 J4.10 J4.12 J4.14 J4.16 J4.18 J4.20 J5.5 J29.1 J29.2 J40.3 J40.4 J40.13 J40.47 J40.48 J41.25 J41.26 J41.53 J41.54 JP7.19 K3.1 K3.2 R2.2 R5.2 R6.2 R18.1 SW1.4 SW1.5 U2.4 U4.4 U5.6 U5.12 U5.28 U5.41 U5.46 U5.52 U5.54 U6.6 U6.14 U9.1 U16-.14 U16-.22 U16-.37 U16-.48 U16-.61 U16-.71 U16-.90 U16-.102 U16-.113 U16-.126 U16-.135 U16-.148 U16-.158 U18.3 UP1.1 | length 1320.3
  Top Layer w0.254: U16-.37@134.624,141.09 136.01,141.09 136.906,141.986 141.478,141.986 137.16,146.304 ; U16-.22@134.624,148.59 136.017,148.59 137.16,147.447 137.16,146.304 ; U16-.14@134.624,152.59 136.716,152.59 137.16,152.146 137.16,146.304 ; U16-.48@138.574,135.39 138.574,136.288 138.811,136.525 142.113,136.525 142.494,136.906 ; U16-.61@145.074,135.39 145.074,143.637 ; 146.074,159.869 U16-.158@146.074,161.54 ; U16-.71@150.067,135.39 150.067,145.034 ; 150.495,149.225 150.503,149.217 ; 151.074,159.893 U16-.148@151.074,161.54 ; 153.924,149.225 158.877,149.225 159.242,149.59 U16-.113@161.024,149.59 ; 157.574,159.225 U16-.135@157.574,161.54 ; 158.623,143.582 158.623,138.938 159.471,138.09 U16-.90@161.024,138.09 162.265,138.09 ; 159.131,144.09 U16-.102@161.024,144.09 ; 159.646,156.09 U16-.126@161.024,156.09 ; C11.2@167.335,144.603 C11.2@167.335,144.831 ; C39.1@170.815,173.736 172.339,173.736
  Top Layer w0.508: 78.232,103.632 77.089,104.775 77.089,135.509 78.497,136.917 ; 81.026,110.744 82.626,109.144 J5.5@85.242,109.144 86.944,109.144 ; U18.3@99.329,141.775 99.865,141.775 C97.1@102.108,144.018 ; 120.65,150.241 v1(120.65,168.097) ; C4.2@125.223,147.828 124.46,147.828 123.952,148.336 123.952,157.988 ; C24.2@125.273,157.353 124.587,157.353 123.952,157.988 ; C56.2@125.273,162.941 123.952,161.62 123.952,157.988 ; 142.621,185.42 142.621,188.722 J40.13@143.891,189.992 ; 157.574,155.989 157.988,155.575 159.131,155.575 159.646,156.09 ; 162.265,138.09 162.687,137.668 v1(168.402,137.668) ; v1(166.624,145.542) C11.2@167.335,144.831 ; 189.738,194.437 195.58,194.437 196.342,193.675
  Top Layer w0.762: 78.232,103.632 83.058,103.632 84.201,102.489 84.201,97.409 84.963,96.647 v1(125.73,96.647) ; 78.497,136.917 J29.1@83.137,136.917 J29.2@88.567,136.917 ; C59.2@80.137,124.591 C60.1@82.8,124.591 ; 81.026,110.744 81.026,120.523 82.169,121.666 C74.1@82.804,121.666 ; C60.1@82.804,124.587 C74.1@82.804,121.666 ; U9.1@86.055,120.625 85.014,121.666 C74.1@82.804,121.666 ; 86.944,109.144 87.503,108.585 87.503,104.775 ; J4.20@87.884,189.611 87.884,199.39 89.535,201.041 v1(108.839,201.041) 130.175,201.041 131.191,200.025 J40.3@131.191,189.992 J40.4@131.191,187.452 130.429,186.69 v1(130.429,168.097) 126.695,168.097 125.273,166.675 C56.2@125.273,162.941 ; 88.646,96.647 87.503,97.79 87.503,104.775 ; J3.3@97.485,108.661 97.485,105.867 97.003,105.385 ; 98.171,201.041 96.901,199.771 96.901,184.932 98.181,183.652 ; C47.1@98.181,182.753 98.181,183.652 ; U5.28@98.185,163.672 98.185,167.908 98.679,168.402 111.506,168.402 ; C76.1@98.552,121.793 C75.1@98.552,124.968 99.441,124.968 100.203,124.206 v1(100.203,123.444) 104.828,128.069 C29.2@109.601,128.069 C30.2@114.554,128.069 117.854,128.069 R6.2@118.745,127.178 C31.2@118.745,125.298 R5.2@120.65,125.298 ; D6.1@100.584,105.791 99.441,104.648 97.739,104.648 97.003,105.385 ; C97.1@102.108,144.018 102.108,143.637 v1(102.87,142.875) ; U4.4@105.264,191.643 108.331,191.643 108.839,192.151 v1(108.839,197.612) ; 107.696,168.402 108.585,167.513 U5.41@108.585,163.672 108.585,162.179 107.188,160.782 107.188,156.718 107.823,156.083 109.728,156.083 110.18,156.535 C45.1@110.18,157.988 C50.1@114.985,157.988 ; 107.95,96.647 109.316,98.013 SW1.4@111.125,98.013 ; C44.1@108.585,182.753 108.585,183.515 107.823,184.277 ; v1(109.52,145.08) 113.919,149.479 119.888,149.479 120.65,150.241 ; v1(110.185,172.466) U5.12@110.185,175.672 v1(110.185,180.213) ; SW1.5@111.125,110.013 107.792,110.013 107.315,110.49 107.315,120.904 107.749,121.338 C34.2@109.474,121.338 C33.2@114.554,121.338 ; 112.141,184.277 116.84,184.277 ; 112.268,201.041 113.36,199.949 C22.2@113.36,198.501 ; U5.46@112.585,163.672 112.585,167.323 111.506,168.402 ; C48.1@112.59,182.753 112.59,183.574 111.887,184.277 v1(109.728,184.277) 107.823,184.277 ; 113.157,96.647 114.681,98.171 114.681,107.518 D1.K@116.002,108.839 ; U5.6@114.985,175.672 v1(114.985,180.213) ; 115.062,105.791 116.205,106.934 117.602,106.934 C23.1@119.507,108.839 ; 115.316,96.647 116.713,98.044 K3.2@116.713,99.758 ; 116.205,168.402 117.385,167.222 U5.52@117.385,163.672 ; C49.1@117.385,182.753 117.385,183.732 116.84,184.277 ; U5.54@118.985,163.672 118.985,167.527 118.11,168.402 111.506,168.402 ; C46.1@119.761,182.753 119.761,183.769 119.253,184.277 116.84,184.277 ; 123.19,96.647 124.562,98.019 K3.1@124.562,99.758 ; v1(123.825,143.302) C27.1@125.222,143.302 ; v1(123.825,145.08) C26.1@125.222,145.08 ; C4.2@125.223,147.828 C3.2@125.223,149.606 C25.2@125.223,151.13 ; C19.2@125.273,139.319 C18.2@125.273,137.668 v1(123.825,137.668) 123.825,140.207 C5.2@125.223,141.605 126.366,140.462 127.762,140.462 137.414,130.81 137.414,127.635 137.998,127.051 C6.2@139.065,127.051 C7.2@145.542,127.051 C8.2@150.622,127.051 C1.2@153.797,127.051 C9.2@156.21,127.051 v1(157.734,127.051) v1(157.734,126.111) ; v1(126.365,131.064) 127.762,129.667 U2.4@128.711,129.667 129.997,130.953 R2.2@129.997,132.334 ; C36.2@135.001,123.396 C20.2@140.462,123.396 ; C17.2@139.065,169.875 v1(139.065,171.45) 139.065,181.864 142.621,185.42 ; C21.2@140.462,119.583 139.446,120.599 139.446,122.377 C20.2@140.462,123.393 141.783,123.393 142.353,122.823 UP1.1@143.828,122.823 143.828,123.762 145.415,125.349 156.972,125.349 v1(157.734,126.111) ; 141.478,141.986 142.494,143.002 ; R18.1@142.24,169.799 v1(142.24,171.45) ; 142.494,136.906 142.494,143.002 ; J40.13@143.891,189.992 143.891,197.739 144.526,198.374 185.801,198.374 187.071,197.104 ; 145.074,143.637 145.709,144.272 ; 146.074,159.869 146.431,159.512 150.693,159.512 ; C16.2@146.177,169.875 v1(146.177,171.45) ; C15.2@149.606,169.875 v1(149.606,171.45) ; 150.495,149.225 153.924,149.225 154.432,149.733 154.432,156.972 153.162,158.242 ; 150.503,149.217 150.067,148.782 150.067,145.034 ; 151.074,159.893 150.693,159.512 ; v1(157.099,171.45) C14.2@157.099,169.875 167.335,159.639 C13.2@167.335,156.591 C2.2@167.335,154.686 C12.2@167.335,150.114 167.335,149.555 v1(166.624,148.844) ; 157.574,159.225 157.574,155.989 155.321,158.242 153.162,158.242 ; C37.2@157.734,123.65 v1(157.734,126.111) ; J41.26@159.131,107.696 J41.25@159.131,110.236 ; 159.131,144.09 158.623,143.582 158.115,144.09 151.011,144.09 150.067,145.034 ; v1(166.624,139.7) 167.335,138.989 C10.2@167.335,138.607 ; C38.2@166.624,176.35 166.624,174.752 167.64,173.736 C39.1@170.815,173.736 178.054,173.736 178.85,174.532 U6.6@178.85,179.324 ; v1(168.402,132.715) 182.88,132.715 186.182,129.413 BT1.2@186.182,125.222 v1(187.96,123.444) ; D5.K@170.815,164.77 172.898,164.77 173.482,165.354 v1(173.482,168.783) 173.482,172.593 172.339,173.736 ; J40.48@187.071,187.452 J40.47@187.071,189.992 187.071,197.104 ; JP7.19@188.849,159.853 U6.14@188.849,166.823 ; U6.14@188.85,166.824 188.85,168.403 189.23,168.783 v1(189.865,168.783) 195.199,168.783 196.342,169.926 196.342,193.675 ; 189.738,194.437 187.071,197.104 ; v1(194.691,104.394) J41.54@194.691,107.696 J41.53@194.691,110.236 ; 87.503,104.775 88.113,105.385 J3.2@92.964,105.385 97.003,105.385 ; 98.181,183.652 98.806,184.277 107.823,184.277 ; 142.494,143.002 142.494,143.637 143.129,144.272 145.709,144.272 ; 145.709,144.272 149.305,144.272 150.067,145.034 ; 150.693,159.512 151.963,158.242 153.162,158.242
  Bottom Layer w0.762: J4.4@87.884,169.291 J4.6@87.884,171.831 J4.8@87.884,174.371 J4.10@87.884,176.911 J4.12@87.884,179.451 J4.14@87.884,181.991 J4.16@87.884,184.531 J4.18@87.884,187.071 J4.20@87.884,189.611 ; J3.3@97.485,108.661 100.203,111.379 v1(100.203,123.444) 102.87,126.111 v1(102.87,142.875) ; v1(108.839,197.612) v1(108.839,201.041) ; v1(109.52,145.08) v1(123.825,145.08) v1(123.825,143.302) v1(123.825,137.668) 126.365,137.668 127.508,136.525 127.508,132.207 125.73,130.429 v1(125.73,96.647) ; v1(109.728,184.277) 110.185,183.82 v1(110.185,180.213) v1(114.985,180.213) ; v1(110.185,172.466) 110.185,169.088 v1(110.871,168.402) ; SW1.4@111.125,98.013 113.157,100.045 113.157,107.981 SW1.5@111.125,110.013 ; v1(120.65,168.097) v1(130.429,168.097) ; v1(139.065,171.45) v1(142.24,171.45) v1(146.177,171.45) v1(149.606,171.45) v1(157.099,171.45) ; v1(157.734,126.111) 157.734,124.587 158.877,123.444 v1(187.96,123.444) 194.056,123.444 194.691,122.809 J41.53@194.691,110.236 ; v1(157.734,127.051) 165.913,127.051 166.624,127.762 v1(166.624,139.7) v1(166.624,145.542) v1(166.624,148.844) ; J41.26@159.131,107.696 159.131,105.283 160.02,104.394 v1(194.691,104.394) ; v1(168.402,132.715) v1(168.402,137.668) ; v1(173.482,168.783) v1(189.865,168.783)
  other v1: 190.5,97.155 85.725,97.79 190.5,98.425 85.725,99.06 190.5,99.695 85.725,100.33 190.5,100.965 85.725,101.6 84.455,196.85 190.5,196.85 84.455,198.12 190.5,198.12 84.455,199.39 190.5,199.39 84.455,200.66 190.5,200.66
NetBT1_1: BT1.1 J41.2 Q4.2 | length 125.8
  Top Layer w0.254: v1(127,111.887) 127,108.077 127.381,107.696 J41.2@128.651,107.696 128.651,106.426 129.032,106.045 167.64,106.045 168.021,106.426 168.021,111.506 167.132,112.395 167.132,124.714 167.64,125.222 BT1.1@169.926,125.222 ; Q4.2@127,159.004 129.794,156.21 129.794,150.368 129.54,150.114 v1(129.413,150.114)
  Bottom Layer w0.254: v1(127,111.887) 128.905,111.887 129.54,112.522 129.54,144.018 134.493,148.971 134.493,149.733 134.112,150.114 v1(129.413,150.114)
NetC1_1: C1.1 U16-.81 | length 10.4
  Top Layer w0.254: C1.1@153.797,128.651 154.432,128.651 154.559,128.778 v1(154.559,129.667) ; v1(154.559,136.779) 155.074,136.264 U16-.81@155.074,135.39
  Bottom Layer w0.254: v1(154.559,129.667) v1(154.559,136.779)